# Allegro board A0.brd
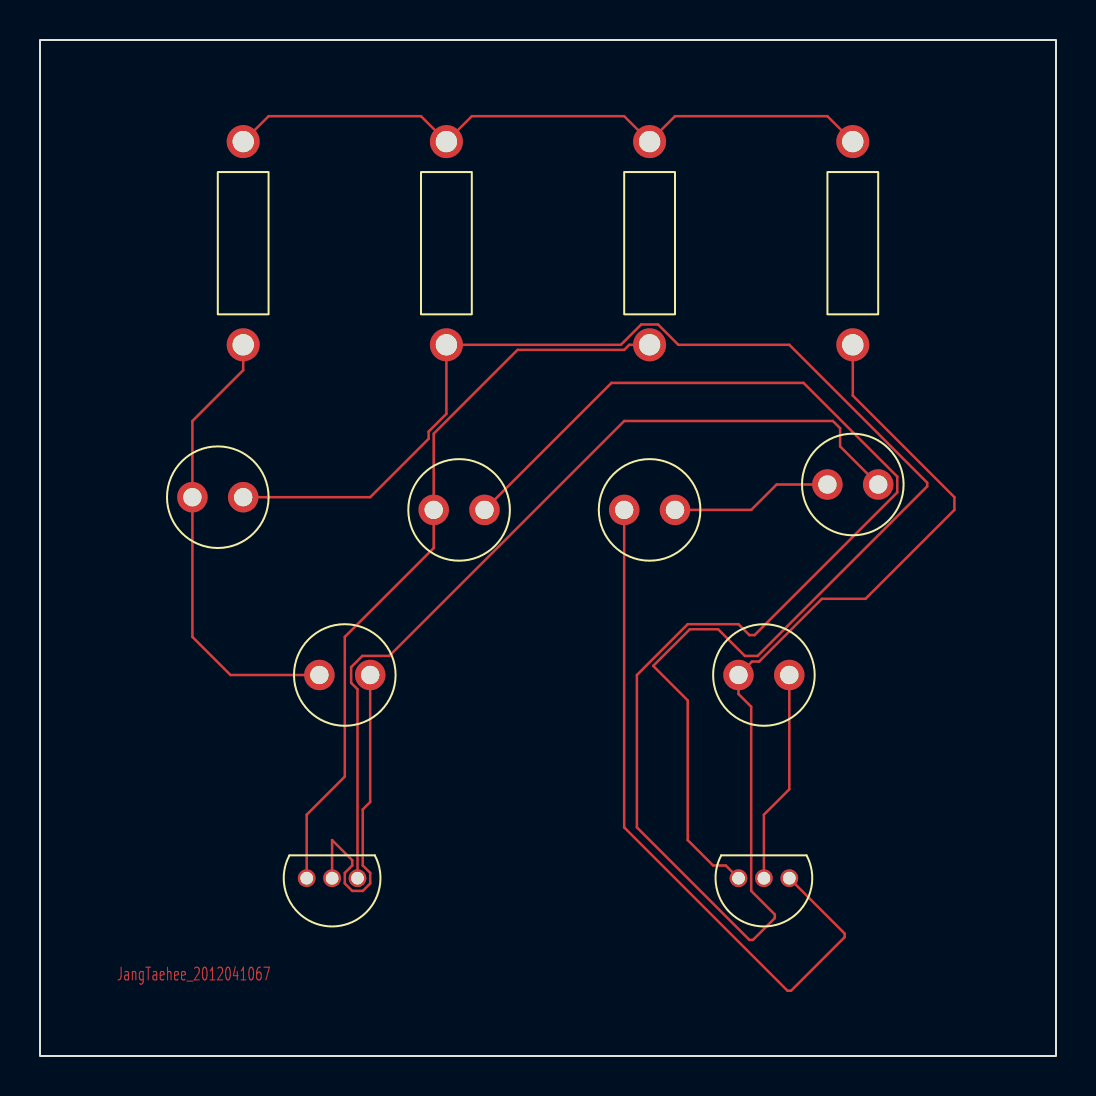
[diagram p0: board, top side]
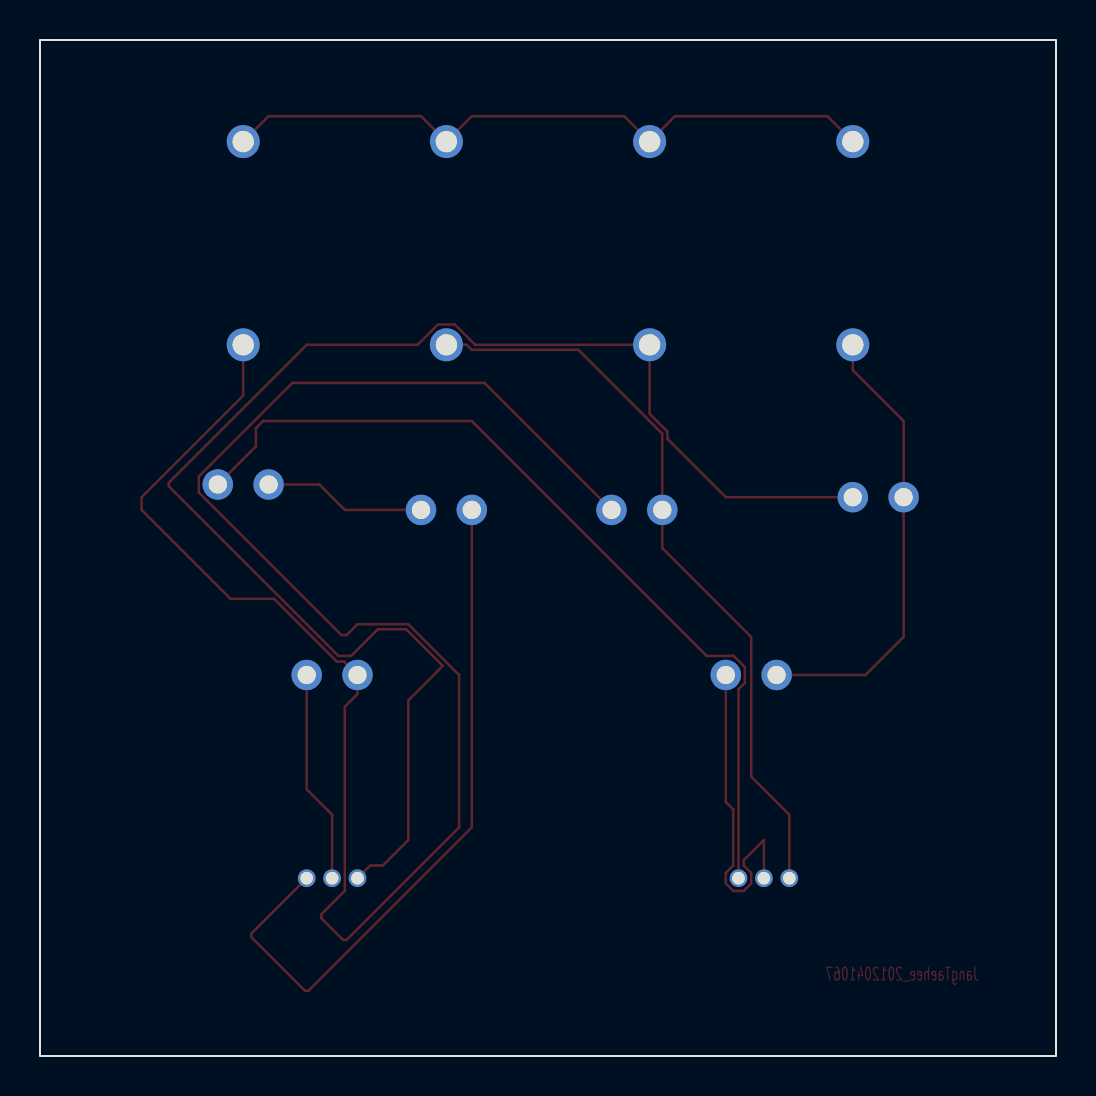
[diagram p1: board, bottom side, seen from below]

Outline 50.8 x 50.8 mm; copper layers: TOP, BOTTOM. Coordinates in mm from the lower left corner of the outline.
Outline path: rectangle 0,0 50.8,50.8

## Placement (name value [footprint] x y rotation side)
C1  CAP POL  [CAP196]  7.62 27.94 270 top
C2  CAP POL  [CAP196]  22.23 27.3 90 top
C3  CAP POL  [CAP196]  31.75 27.3 90 top
C4  CAP POL  [CAP196]  39.37 28.57 270 top
D1  LED  [CAP196]  16.51 19.05 90 top
D2  LED  [CAP196]  37.47 19.05 90 top
Q1  NPN ECB  [TO92]  15.88 8.89 270 top
Q2  NPN ECB  [TO92]  37.47 8.89 270 top
R1  R  [RES400]  10.16 45.72 180 top
R2  R  [RES400]  20.32 45.72 180 top
R3  R  [RES400]  30.48 45.72 180 top
R4  R  [RES400]  40.64 45.72 180 top

## Library data of the parts
C1-C4 = CAP POL: Tolerance: ***; User Part Number: ***
D1 D2 = LED: Tolerance: ***; User Part Number: ***
Q1 Q2 = NPN ECB
R1-R4 = R: Tolerance: ***; User Part Number: ***

## Footprints (pads in the part's own frame, mm; a bottom-side part is the same pattern mirrored in y, then rotated)
CAP196
  round 1.524 hole 0.914: 1(0,0) 2(0,2.54)
RES400
  round 1.651 hole 1.067: 1(0,0) 2(0,10.16)
TO92
  round 0.889 hole 0.635: 1(0,0) 2(0,-1.27) 3(0,-2.54)

## Nets
GND: C3.1 C4.1
VCC: R1.1 R2.1 R3.1 R4.1
N00290: C2.2 Q1.3(B) R3.2
N00297: C2.1 D2.2(ANODE) R4.2
N00304: C1.1 D1.2(ANODE) R1.2
N00327: D2.1(CATHODE) Q2.2(C)
N00331: D1.1(CATHODE) Q1.2(C)
N00407: C1.2 Q2.3(B) R2.2
N01384: C3.2 Q2.1(E)
N01388: C4.2 Q1.1(E)

## Routing (per net, layer and track width the routed paths; a pad name or vN(x,y) marks a point on that pad's centre or on a via; arc(x,y) is an arc through that point)
GND: length 8.1
  TOP w0.127: C3.1 35.56,27.3 36.83,28.57 C4.1
VCC: length 33.6
  TOP w0.127: R1.1 11.43,46.99 19.05,46.99 R2.1 21.59,46.99 29.21,46.99 R3.1 31.75,46.99 39.37,46.99 R4.1
N00290: length 37.5
  TOP w0.127: R3.2 29.46,35.56 29.21,35.31 23.88,35.31 19.68,31.11 19.68,25.4 15.24,20.95 15.24,13.97 13.34,12.06 Q1.3
N00297: length 98
  TOP w0.127: C2.1 28.57,33.66 38.18,33.66 42.86,28.97 42.86,28.18 35.73,21.04 35.47,21.04 34.92,21.59 32.38,21.59 29.84,19.05 29.84,11.43 35.47,5.8 35.65,5.8 36.74,6.9 36.74,7.07 35.56,8.26 35.56,17.46 34.92,18.1 34.92,19.05 35.6,19.72 35.96,19.72 39.09,22.86 41.27,22.86 45.72,27.3 45.72,27.94 40.64,33.02 R4.2
N00304: length 22.8
  TOP w0.127: R1.2 10.16,34.29 7.62,31.75 C1.1 7.62,20.95 9.53,19.05 D1.2
N00327: length 10.7
  TOP w0.127: D2.1 37.47,13.34 36.2,12.06 Q2.2
N00331: length 17
  TOP w0.127: D1.1 16.51,12.7 16.14,12.33 16.14,9.53 16.51,9.15 16.51,8.63 16.14,8.26 15.61,8.26 15.24,8.63 15.24,9.15 15.61,9.53 15.61,9.79 14.61,10.79 Q1.2
N00407: length 74.7
  TOP w0.127: C1.2 16.51,27.94 19.43,30.86 19.43,31.22 20.32,32.11 R2.2 29.04,35.56 30.06,36.58 30.9,36.58 31.92,35.56 37.47,35.56 44.36,28.66 44.36,28.49 35.88,20 35.24,20 33.91,21.34 32.49,21.34 30.66,19.51 32.38,17.78 32.38,10.79 33.66,9.53 34.29,9.53 34.92,8.89
N01384: length 35.5
  TOP w0.127: Q2.1 40.23,6.12 40.23,5.94 37.55,3.26 37.38,3.26 29.21,11.43 C3.2
N01388: length 44
  TOP w0.127: C4.2 40.01,30.48 40.01,31.39 39.65,31.75 29.21,31.75 17.46,20 16.12,20 15.56,19.44 15.56,18.66 15.88,18.34 Q1.1

## Text on the board
TOP: JangTaehee_2012041067
